# EAGLE board KegeratorController (EAGLE 7.4.0)
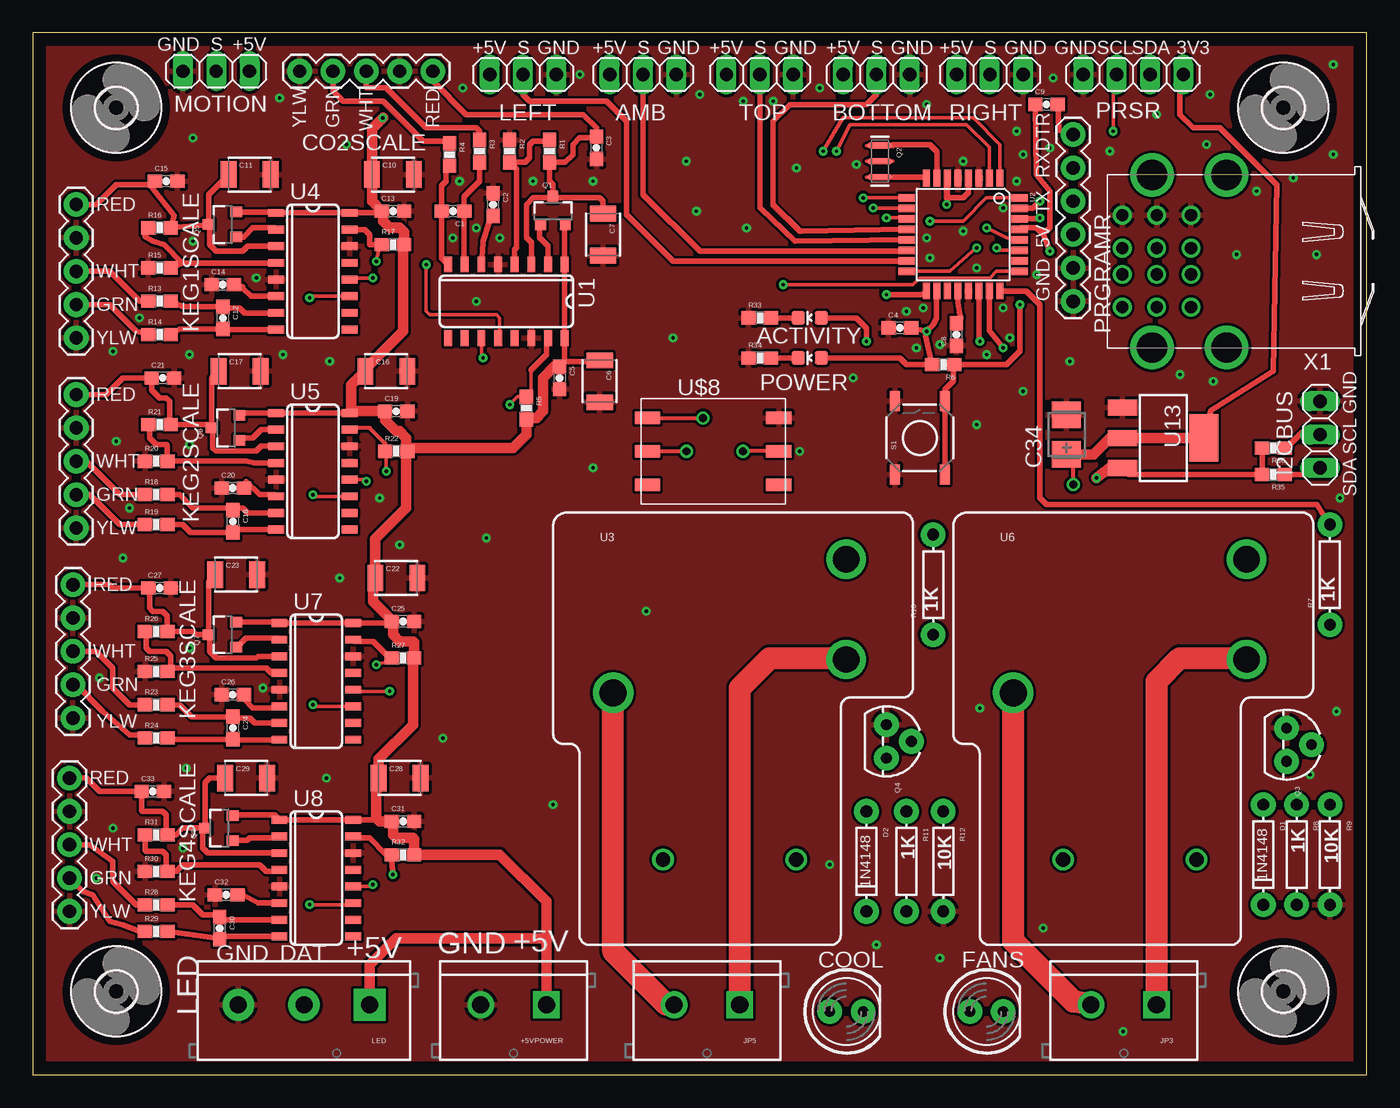
[diagram p0: board, top side]
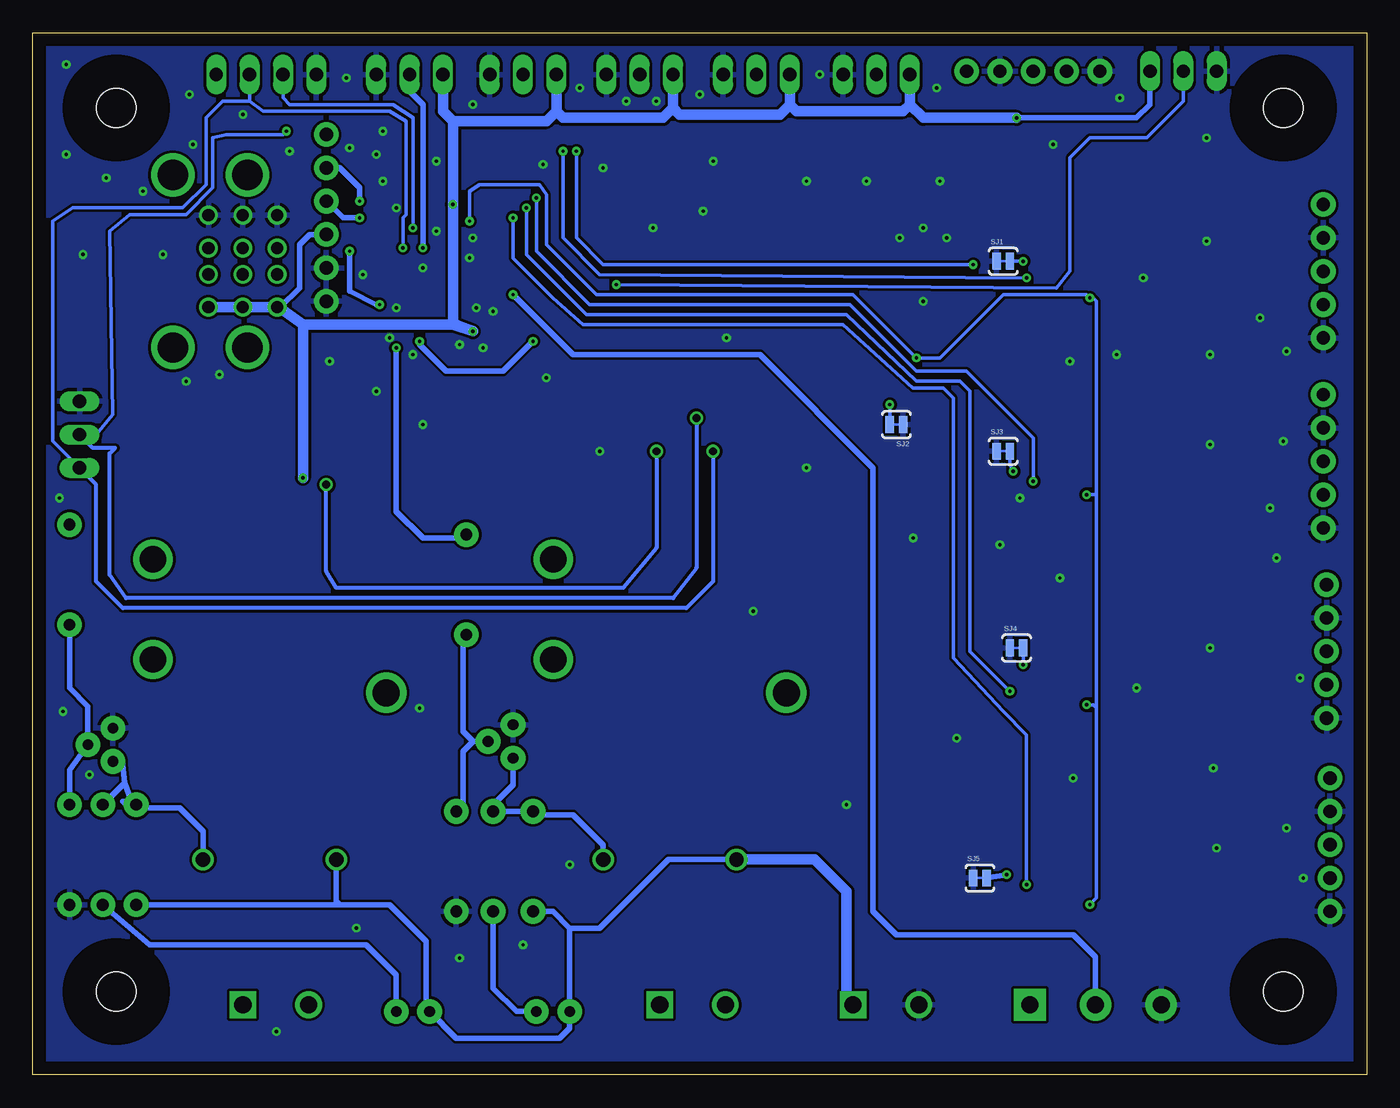
[diagram p1: board, bottom side, seen from below]

Size 101.6 x 79.38 mm. Coordinates in mm from the lower left corner, seen from the top.
Outline: 0,0 101.6,0 101.6,79.38 0,79.38 0,0
Copper layers (1*16): Top 0.035mm / dielectric 1.5mm / Bottom 0.035mm
Design rules "default *": minimum track width 10mil, minimum drill 10mil, track to track 8mil, track to pad 8mil, pad to pad 8mil, via to via 8mil, smd to smd 8mil, copper to edge 40mil, drill to drill 8mil, minimum pad ring 10mil, minimum via ring 8mil, stop-mask expansion 4mil, vias tented up to drill 0mil, thermal gap 10mil
Net classes: 0 default: width 0.203 mm; 1 vcc: width 0.254 mm

## Footprints (pad centres in the part's own frame; a part is rotated, then mirrored left to right if it is on the bottom)
SCREWTERMINAL-5MM-2 = drill 1.3 pad 2.032 square: 1 0,0 | drill 1.3 pad 2.032: 2 5,0
0603-LED-ALT1 = smd 1 x 1: A 0,-0.877; C 0,0.877
1X03 = drill 1.016 long: 1 -2.54,0; 2 0,0; 3 2.54,0
0603-CAP = smd 1.1 x 1: 1 -0.85,0; 2 0.85,0
1210 = smd 1.2 x 2: 1 -1.6,0; 2 1.6,0
CT3528 = smd 2 x 2.2: + -1.5,0; - 1.5,0
1X05 = drill 1.016 pad 1.88: 1 0,0; 2 2.54,0; 3 5.08,0; 4 7.62,0; 5 10.16,0
LED5MM = drill 0.813 pad 1.88: A -1.27,0; K 1.27,0
DIODE-1N4148 = drill 0.9 pad 1.88: A -3.81,0; C 3.81,0
SCREWTERMINAL-5MM-3 = drill 1.3 pad 2.413 square: 1 0,0 | drill 1.3 pad 2.413: 2 5,0; 3 10,0
1X06 = drill 1.016 pad 1.88: 1 0,0; 2 2.54,0; 3 5.08,0; 4 7.62,0; 5 10.16,0; 6 12.7,0
1X04 = drill 1.016 long: 1 -3.81,0; 2 -1.27,0; 3 1.27,0; 4 3.81,0
SOT23-3 = smd 0.8 x 0.9: 1 -0.95,-1; 2 0.95,-1; 3 0,1.1
RESONATOR-SMD-1:1 = smd 0.45 x 1.905: 1 -1.2,0; 2 0,0; 3 1.2,0
TO-92 = drill 0.813 pad 1.88: 1 -1.27,0; 2 0,1.905; 3 1.27,0
0603-RES = smd 1.1 x 1: 1 -0.85,0; 2 0.85,0
AXIAL-0.3 = drill 0.9 pad 1.88: P$1 -3.81,0; P$2 3.81,0
TACTILE-SWITCH-SMD-ALT01 = smd 1.524 x 0.762: 1 -2.794,1.905; 2 2.794,1.905; 3 -2.794,-1.905; 4 2.794,-1.905
PAD-JUMPER-2-NC_BY_TRACE_YES_SILK = smd 0.635 x 1.27: 1 -0.508,0; 2 0.508,0
SO16 = smd 0.6 x 1.2: 1 -4.445,-2.8; 2 -3.175,-2.8; 3 -1.905,-2.8; 4 -0.635,-2.8; 5 0.635,-2.8; 6 1.905,-2.8; 7 3.175,-2.8; 8 4.445,-2.8; 9 4.445,2.8; 10 3.175,2.8; 11 1.905,2.8; 12 0.635,2.8; 13 -0.635,2.8; 14 -1.905,2.8; 15 -3.175,2.8; 16 -4.445,2.8
TQFP32-08 = smd 1.27 x 0.559: 1 -4.293,2.8; 2 -4.293,2; 3 -4.293,1.2; 4 -4.293,0.4; 5 -4.293,-0.4; 6 -4.293,-1.2; 7 -4.293,-2; 8 -4.293,-2.8; 17 4.293,-2.8; 18 4.293,-2; 19 4.293,-1.2; 20 4.293,-0.4; 21 4.293,0.4; 22 4.293,1.2; 23 4.293,2; 24 4.293,2.8 | smd 0.559 x 1.27: 9 -2.8,-4.293; 10 -2,-4.293; 11 -1.2,-4.293; 12 -0.4,-4.293; 13 0.4,-4.293; 14 1.2,-4.293; 15 2,-4.293; 16 2.8,-4.293; 25 2.8,4.293; 26 2,4.293; 27 1.2,4.293; 28 0.4,4.293; 29 -0.4,4.293; 30 -1.2,4.293; 31 -2,4.293; 32 -2.8,4.293
RELAY-T9A-2 = drill 1.1: COIL1 -6.61,-10.27; COIL2 3.55,-10.27 | drill 2.057: MAIN -10.41,2.43 | drill 2: NC 7.35,12.6; NO 7.35,4.97
SOT223 = smd 1.219 x 2.235: 1 -2.311,-3.099; 2 0,-3.099; 3 2.311,-3.099 | smd 3.6 x 2.2: 4 0,3.099
3,0 = hole 3: 0,0
SMTAN = smd 1.93 x 0.965: P$1 5,2.54; P$2 5,0; P$3 5,-2.54; P$4 -5,-2.54; P$5 -5,0; P$6 -5,2.54
85-32003-00X-1 = drill 0.92 pad 1.27: 1-1 2.71,3.5; 1-2 2.71,1; 1-3 2.71,-1; 1-4 2.71,-3.5; 2-1 5.33,3.5; 2-2 5.33,1; 2-3 5.33,-1; 2-4 5.33,-3.5; 3-1 7.95,3.5; 3-2 7.95,1; 3-3 7.95,-1; 3-4 7.95,-3.5 | drill 2.3 pad 3: M1 0,6.57; M2 0,-6.57; M3 5.68,6.57; M4 5.68,-6.57

## Placement (x,y rotation side)
+5VPOWER  Load  [SCREWTERMINAL-5MM-2]  39.12,5.33 180 top
ACTIVITY  Red  [0603-LED-ALT1]  59.18,57.66 90 top
AMB  [1X03]  46.48,76.2 0 top
BOTTOM  [1X03]  64.26,76.2 0 top
C1  0.1uF  [0603-CAP]  32,65.79 180 top
C2  0.1uF  [0603-CAP]  35.05,66.29 270 top
C3  0.1uF  [0603-CAP]  42.93,70.61 270 top
C4  0.1uF  [0603-CAP]  66.04,56.9 0 top
C5  0.1uF  [0603-CAP]  40.13,53.09 270 top
C6  10uF  [1210]  43.18,52.83 270 top
C7  10uF  [1210]  43.43,64.01 270 top
C8  0.1uF  [0603-CAP]  70.36,56.39 90 top
C9  0.1uF  [0603-CAP]  77.22,73.91 0 top
C10  10uF  [1210]  27.43,68.58 0 top
C11  10uF  [1210]  16.51,68.58 0 top
C12  0.1uF  [0603-CAP]  14.48,57.66 270 top
C13  0.1uF  [0603-CAP]  27.43,65.79 0 top
C14  0.1uF  [0603-CAP]  14.48,60.2 0 top
C15  0.1uF  [0603-CAP]  10.16,68.07 0 top
C16  10uF  [1210]  26.92,53.59 0 top
C17  10uF  [1210]  15.75,53.59 0 top
C18  0.1uF  [0603-CAP]  15.24,42.16 270 top
C19  0.1uF  [0603-CAP]  27.69,50.55 0 top
C20  0.1uF  [0603-CAP]  15.24,44.7 0 top
C21  0.1uF  [0603-CAP]  9.91,53.09 0 top
C22  10uF  [1210]  27.69,37.85 0 top
C23  10uF  [1210]  15.49,38.1 0 top
C24  0.1uF  [0603-CAP]  15.24,26.42 270 top
C25  0.1uF  [0603-CAP]  28.19,34.54 0 top
C26  0.1uF  [0603-CAP]  15.24,28.96 0 top
C27  0.1uF  [0603-CAP]  9.65,37.08 0 top
C28  10uF  [1210]  27.94,22.61 0 top
C29  10uF  [1210]  16.26,22.61 0 top
C30  0.1uF  [0603-CAP]  14.22,11.18 270 top
C31  0.1uF  [0603-CAP]  28.19,19.3 0 top
C32  0.1uF  [0603-CAP]  14.73,13.72 0 top
C33  0.1uF  [0603-CAP]  9.14,21.59 0 top
C34  10uF  [CT3528]  78.74,48.77 90 top
CO2SCALE  [1X05]  20.32,76.45 0 top
COOL  [LED5MM]  61.98,4.83 0 top
D1  1N4148  [DIODE-1N4148]  93.73,16.76 270 top
D2  1N4148  [DIODE-1N4148]  63.5,16.26 270 top
FANS  [LED5MM]  72.64,4.83 0 top
I2CBUS  [1X03]  98.04,48.77 90 top
JP3  Load  [SCREWTERMINAL-5MM-2]  85.6,5.33 180 top
JP5  Load  [SCREWTERMINAL-5MM-2]  53.85,5.33 180 top
KEG1SCALE  [1X05]  3.3,56.13 90 top
KEG2SCALE  [1X05]  3.3,41.66 90 top
KEG3SCALE  [1X05]  3.05,27.18 90 top
KEG4SCALE  [1X05]  2.79,12.45 90 top
LED  [SCREWTERMINAL-5MM-3]  25.65,5.33 180 top
LEFT  [1X03]  37.34,76.2 0 top
MOTION  [1X03]  13.97,76.45 180 top
POWER  Red  [0603-LED-ALT1]  59.18,54.61 90 top
PRGRAMR  FTDI Basic  [1X06]  79.25,71.63 270 top
PRSR  [1X04]  83.82,76.2 180 top
Q1  MMBT4403  [SOT23-3]  39.62,65.79 0 top
Q2  8/16/20MHz  [RESONATOR-SMD-1:1]  64.52,69.6 270 top
Q3  2N3904  [TO-92]  95.5,25.15 270 top
Q4  2N3904  [TO-92]  65.02,25.4 270 top
Q5  MMBT4403  [SOT23-3]  14.48,64.77 90 top
Q6  MMBT4403  [SOT23-3]  14.73,49.28 90 top
Q7  MMBT4403  [SOT23-3]  14.48,33.53 90 top
Q8  MMBT4403  [SOT23-3]  14.22,18.8 90 top
R1  20K  [0603-RES]  39.37,70.36 270 top
R2  8.2K  [0603-RES]  36.32,70.36 270 top
R3  100  [0603-RES]  34.04,70.36 270 top
R4  100  [0603-RES]  31.75,70.1 270 top
R5  10K  [0603-RES]  37.59,50.8 270 top
R6  10K  [0603-RES]  69.34,54.1 180 top
R7  1K  [AXIAL-0.3]  98.81,38.1 90 top
R8  1K  [AXIAL-0.3]  96.27,16.76 270 top
R9  10K  [AXIAL-0.3]  98.81,16.76 270 top
R10  1K  [AXIAL-0.3]  68.58,37.34 90 top
R11  1K  [AXIAL-0.3]  66.55,16.26 270 top
R12  10K  [AXIAL-0.3]  69.34,16.26 270 top
R13  100  [0603-RES]  9.65,58.93 0 top
R14  100  [0603-RES]  9.65,56.39 0 top
R15  8.2K  [0603-RES]  9.65,61.47 0 top
R16  20K  [0603-RES]  9.65,64.52 0 top
R17  10K  [0603-RES]  27.43,63.25 0 top
R18  100  [0603-RES]  9.4,44.2 0 top
R19  100  [0603-RES]  9.4,41.91 0 top
R20  8.2K  [0603-RES]  9.4,46.74 0 top
R21  20K  [0603-RES]  9.65,49.53 0 top
R22  10K  [0603-RES]  27.69,47.5 0 top
R23  100  [0603-RES]  9.4,28.19 0 top
R24  100  [0603-RES]  9.4,25.65 0 top
R25  8.2K  [0603-RES]  9.4,30.73 0 top
R26  20K  [0603-RES]  9.4,33.78 0 top
R27  10K  [0603-RES]  28.19,31.75 0 top
R28  100  [0603-RES]  9.4,12.95 0 top
R29  100  [0603-RES]  9.4,10.92 0 top
R30  8.2K  [0603-RES]  9.4,15.49 0 top
R31  20K  [0603-RES]  9.4,18.29 0 top
R32  10K  [0603-RES]  28.19,16.76 0 top
R33  1K  [0603-RES]  55.37,57.66 0 top
R34  1K  [0603-RES]  55.37,54.61 0 top
R35  10K  [0603-RES]  94.49,45.72 180 top
R36  10K  [0603-RES]  94.49,47.75 180 top
RIGHT  [1X03]  72.9,76.2 0 top
S1  Reset  [TACTILE-SWITCH-SMD-ALT01]  67.56,48.51 90 top
SJ1  [PAD-JUMPER-2-NC_BY_TRACE_YES_SILK]  27.69,61.98 0 bottom
SJ2  [PAD-JUMPER-2-NC_BY_TRACE_YES_SILK]  35.81,49.53 180 bottom
SJ3  [PAD-JUMPER-2-NC_BY_TRACE_YES_SILK]  27.69,47.5 0 bottom
SJ4  [PAD-JUMPER-2-NC_BY_TRACE_YES_SILK]  26.67,32.51 0 bottom
SJ5  [PAD-JUMPER-2-NC_BY_TRACE_YES_SILK]  29.46,14.99 0 bottom
TOP  [1X03]  55.37,76.2 0 top
U1  HX711  [SO16]  36.07,58.93 180 top
U2  ATMEGA328  [TQFP32-08]  70.87,64.01 270 top
U3  RELAYPTH3  [RELAY-T9A-2]  54.61,26.67 0 top
U4  HX711  [SO16]  21.34,61.21 270 top
U5  HX711  [SO16]  21.34,45.97 270 top
U6  RELAYPTH3  [RELAY-T9A-2]  85.09,26.67 0 top
U7  HX711  [SO16]  21.59,29.97 270 top
U8  HX711  [SO16]  21.59,14.99 270 top
U13  LM1117MP-3.3  [SOT223]  86.11,48.51 270 top
U$4  [3,0]  6.35,73.66 0 top
U$5  [3,0]  6.35,6.35 0 top
U$6  [3,0]  95.25,6.35 0 top
U$7  [3,0]  95.25,73.66 0 top
U$8  ABPMANN030PG2A3  [SMTAN]  51.82,47.5 0 top
X1  USB_3P-85-32003-00X-1  [85-32003-00X-1]  90.93,61.98 180 top

## Library data of the parts
+5VPOWER C4 C8 C9 COOL D1 D2 FANS JP3 JP5 PRGRAMR Q3 Q4 R6-R12 R33-R36 U2 U3 U6 = SparkFun
ACTIVITY POWER Q2 S1 = Testing
AMB BOTTOM I2CBUS LEFT MOTION PRSR RIGHT TOP = pinhead
C1-C3 C5 C12-C15 C18-C21 C24-C27 C30-C33 = SparkFun-Capacitors; PROD_ID: CAP-08604
C6 C7 C10 C11 C16 C17 C22 C23 C28 C29 = SparkFun-Capacitors; PROD_ID: CAP-09824
C34 = rcl
CO2SCALE KEG1SCALE KEG2SCALE KEG3SCALE KEG4SCALE = SparkFun-Connectors
LED = SparkFun-Connectors; STOREFRONT_ID: PRT-08433
Q1 Q5-Q8 = SparkFun-DiscreteSemi; PROD_ID: TRANS-09245
R1 R16 R21 R26 R31 = SparkFun-Resistors; PROD_ID: RES-09383
R2 R15 R20 R25 R30 = SparkFun-Resistors; PROD_ID: RES-10646
R3 R4 R13 R14 R18 R19 R23 R24 R28 R29 = SparkFun-Resistors; PROD_ID: RES-07863
R5 R17 R22 R27 R32 = SparkFun-Resistors; PROD_ID: RES-00824
SJ1-SJ5 = SparkFun-Passives
U1 U4 U5 U7 U8 = Testing; PROD_ID: IC-12445
U13 = GHI
U$4-U$7 = holes
U$8 = SoftwareLogistics
X1 = con-cypressindustries; OC_FARNELL: unknown; OC_NEWARK: unknown

## Nets
+3V3: C34.+ PRSR.1 U13.2 U13.4 U$8.P$2
A2+: KEG1SCALE.2 R14.1
A2-: KEG1SCALE.3 R13.1
A3: U2.26
A3+: KEG2SCALE.2 R19.1
A3-: KEG2SCALE.3 R18.1
A4+: KEG3SCALE.2 R24.1
A4-: KEG3SCALE.3 R23.1
A5+: KEG4SCALE.2 R29.1
A5-: KEG4SCALE.3 R28.1
A6: U2.19
A+: CO2SCALE.2 R4.1
A-: CO2SCALE.3 R3.1
AREF: C8.2 U2.20
AVDD: C3.1 C7.1 CO2SCALE.5 Q1.3 R1.2 U1.3
AVDD2: C11.1 C15.1 KEG1SCALE.5 Q5.3 R16.2 U4.3
AVDD3: C17.1 C21.1 KEG2SCALE.5 Q6.3 R21.2 U5.3
AVDD4: C23.1 C27.1 KEG3SCALE.5 Q7.3 R26.2 U7.3
AVDD5: C29.1 C33.1 KEG4SCALE.5 Q8.3 R31.2 U8.3
COIL1: D2.A Q4.3 R11.P$1 U3.COIL2
COIL2: D1.A Q3.3 R8.P$1 U6.COIL2
COMPRESSOR_RELAY: R10.P$2 U2.23
DAT1: U1.12 U2.1
DAT2: U2.2 U4.12
DAT3: U2.9 U5.12
DAT4: U2.10 U7.12
DAT5: U2.11 U8.12
DHT11-1: LEFT.2 U2.15
DHT11-2: RIGHT.2 U2.16
DHT22-1: BOTTOM.2 U2.12
DHT22-2: TOP.2 U2.13
DHT22-3: AMB.2 U2.14
DTR: C9.2 PRGRAMR.1
GND: +5VPOWER.2 AMB.3 BOTTOM.3 C2.1 C3.2 C4.1 C5.2 C6.2 C7.2 C8.1 C10.2 C11.2 C13.2 C14.1 C15.2 C16.2 C17.2 C19.2 C20.1 C21.2 C22.2 C23.2 C25.2 C26.1 C27.2 C28.2 C29.2 C31.2 C32.1 C33.2 C34.- CO2SCALE.1 CO2SCALE.4 I2CBUS.3 KEG1SCALE.1 KEG1SCALE.4 KEG2SCALE.1 KEG2SCALE.4 KEG3SCALE.1 KEG3SCALE.4 KEG4SCALE.1 KEG4SCALE.4 LED.3 LEFT.3 MOTION.3 PRGRAMR.5 PRGRAMR.6 PRSR.4 Q2.2 Q3.1 Q4.1 R2.1 R9.P$2 R12.P$2 R15.1 R20.1 R25.1 R30.1 R33.1 R34.1 RIGHT.3 S1.1 S1.2 SJ1.1 SJ2.1 SJ3.1 SJ4.1 SJ5.1 TOP.3 U1.5 U1.14 U2.3 U2.5 U2.21 U4.5 U4.14 U5.5 U5.14 U7.5 U7.14 U8.5 U8.14 U13.1 U$8.P$1 X1.1-4 X1.2-4 X1.3-4
HEAD_FAN_RELAY: R7.P$2 U2.24
I2C-SCL: I2CBUS.2 PRSR.3 R36.1 U2.28 U$8.P$6
I2C-SDA: I2CBUS.1 PRSR.2 R35.1 U2.27 U$8.P$5
LED_OUTPUT: LED.2 U2.17
LED_SIGNAL: ACTIVITY.A U2.22
MOTION_DETECTOR: MOTION.2 U2.25
N$1: R5.1 SJ2.2 U1.15
N$2: C1.1 R3.2 U1.7
N$3: C1.2 R4.2 U1.8
N$4: Q1.1 U1.2
N$5: Q2.3 U2.8
N$6: R1.1 R2.2 U1.4
N$7: C2.2 U1.6
N$8: Q2.1 U2.7
N$9: Q3.2 R7.P$1 R9.P$1
N$10: FANS.K R8.P$2
N$11: Q4.2 R10.P$1 R12.P$1
N$12: COOL.K R11.P$2
N$13: Q5.1 U4.2
N$14: R15.2 R16.1 U4.4
N$15: C14.2 U4.6
N$16: R17.1 SJ1.2 U4.15
N$17: C12.1 R13.2 U4.7
N$18: C12.2 R14.2 U4.8
N$19: Q6.1 U5.2
N$20: R20.2 R21.1 U5.4
N$21: C20.2 U5.6
N$22: R22.1 SJ3.2 U5.15
N$23: C18.1 R18.2 U5.7
N$24: C18.2 R19.2 U5.8
N$25: Q7.1 U7.2
N$26: R25.2 R26.1 U7.4
N$27: C26.2 U7.6
N$28: R27.1 SJ4.2 U7.15
N$29: C24.1 R23.2 U7.7
N$30: C24.2 R24.2 U7.8
N$31: Q8.1 U8.2
N$32: R30.2 R31.1 U8.4
N$33: C32.2 U8.6
N$34: R32.1 SJ5.2 U8.15
N$35: C30.1 R28.2 U8.7
N$36: C30.2 R29.2 U8.8
N$37: JP3.1 U6.NO
N$38: JP3.2 U6.MAIN
N$39: JP5.1 U3.NO
N$40: JP5.2 U3.MAIN
N$42: ACTIVITY.C R33.2
N$44: POWER.C R34.2
RESET: C9.1 R6.1 S1.3 S1.4 U2.29
RXI: PRGRAMR.3 U2.30
SCK: U1.11 U2.32 U4.11 U5.11 U7.11 U8.11
TXO: PRGRAMR.2 U2.31
VCC: +5VPOWER.1 AMB.1 BOTTOM.1 C4.2 C5.1 C6.1 C10.1 C13.1 C16.1 C19.1 C22.1 C25.1 C28.1 C31.1 COOL.A D1.C D2.C FANS.A LED.1 LEFT.1 MOTION.1 POWER.A PRGRAMR.4 Q1.2 Q5.2 Q6.2 Q7.2 Q8.2 R5.2 R6.2 R17.2 R22.2 R27.2 R32.2 R35.2 R36.2 RIGHT.1 TOP.1 U1.1 U1.16 U2.4 U2.6 U2.18 U3.COIL1 U4.1 U4.16 U5.1 U5.16 U6.COIL1 U7.1 U7.16 U8.1 U8.16 U13.3 X1.1-1 X1.2-1 X1.3-1

## Tracks (layer width: path | path; a pad name or v marks a point on that pad's centre or on a via)
+3V3  (via drill 0.6)
  Top 0.305: U$8.P$2 v54.1,47.5 | v79.25,44.96 79.25,47.27
  Top 0.406: U13.4 89.71,50.6 94.49,53.59 94.74,67.82 90.42,72.14 88.39,72.14 87.38,73.15 87.38,75.95 PRSR.1
  Top 0.813: C34.+ 79.25,47.27 80.8,47.27 82.04,48.51 U13.2 U13.4
  Bottom 0.305: v54.1,47.5 54.1,40.13 56.64,37.08 78.49,37.08 79.25,38.35 v79.25,44.96
A2+
  Top 0.406: R14.1 7.87,56.64 5.84,58.67 KEG1SCALE.2
A2-
  Top 0.406: R13.1 8.13,58.93 5.84,61.21 KEG1SCALE.3
A3+
  Top 0.406: KEG2SCALE.2 4.32,44.2 6.6,41.91 R19.1
A3-
  Top 0.406: KEG2SCALE.3 4.06,46.74 6.6,44.2 R18.1
A4+
  Top 0.406: KEG3SCALE.2 3.3,29.72 5.33,27.69 7.37,25.91 8.29,25.91 R24.1
A4-
  Top 0.406: KEG3SCALE.3 4.83,32.26 6.1,30.99 6.1,29.46 7.37,28.19 R23.1
A5+
  Top 0.406: R29.1 8.13,10.92 6.86,11.43 5.84,11.68 4.57,13.72 3.81,13.97 KEG4SCALE.2
A5-
  Top 0.406: KEG4SCALE.3 4.32,17.53 6.1,16.26 6.1,14.73 7.87,12.95 R28.1
A+
  Top 0.406: CO2SCALE.2 22.86,74.93 23.62,74.17 26.67,74.17 29.72,71.12 31.66,71.12 R4.1
A-
  Top 0.406: CO2SCALE.3 25.4,75.18 26.92,75.18 29.97,72.14 33.78,72.14 34.04,71.88 R3.1
AREF
  Top 0.406: U2.20 70.47,58.82 70.61,57.91 70.7,57.66 C8.2
AVDD
  Top 0.406: CO2SCALE.5 30.48,75.69 33.02,73.15 41.91,73.15 42.93,72.14 C3.1 42.84,71.37 41.66,71.37 41.15,70.87 41.15,70.1 40.55,69.51 R1.2 39.37,68.07 39.62,67.82 Q1.3 | C7.1 43.43,66.55 43.18,66.8 39.71,66.8 Q1.3 | U1.3 37.97,63.37 37.59,63.75 37.59,66.29 38.1,66.8 39.54,66.8 Q1.3
AVDD2
  Top 0.406: KEG1SCALE.5 4.83,66.29 6.35,67.82 8.89,67.82 | 8.89,67.82 9.06,67.82 C15.1 | 8.89,67.82 10.76,65.44 R16.2 Q5.3 | U4.3 16.38,63.12 16,62.74 13.97,62.74 13.46,63.25 13.46,64.69 Q5.3 | Q5.3 13.38,67.05 C11.1
AVDD3
  Top 0.406: KEG2SCALE.5 5.59,51.82 6.86,53.09 C21.1 9.06,52.16 9.65,51.56 10.16,51.56 10.41,51.31 10.41,49.62 R21.2 13.38,49.53 Q6.3 | Q6.3 13.63,53.08 C17.1 | U5.3 17.4,47.88 17.02,47.5 13.97,47.5 13.72,47.75 13.72,49.19 Q6.3
AVDD4
  Top 0.406: U7.3 17.14,31.88 17.02,31.75 13.97,31.75 13.46,32.26 13.46,33.44 Q7.3 | KEG3SCALE.5 5.84,37.34 6.1,37.08 C27.1 8.89,37 8.89,35.56 9.14,35.31 9.91,35.31 10.25,34.96 R26.2 12.19,33.78 12.45,33.53 Q7.3 | Q7.3 13.38,37.58 C23.1
AVDD5
  Top 0.406: KEG4SCALE.5 4.06,22.61 5.08,21.59 C33.1 8.29,20.15 8.38,20.07 9.91,20.07 10.16,19.81 10.16,18.38 R31.2 10.92,18.29 11.43,18.8 Q8.3 | Q8.3 13.12,22.27 13.46,22.61 C29.1 | U8.3 13.34,16.89 12.95,17.27 12.95,18.63 Q8.3
COIL1
  Bottom 0.406: U3.COIL2 58.16,17.52 60.45,19.81 63.25,19.81 D2.A R11.P$1 66.55,20.57 65.02,22.1 Q4.3
COIL2
  Bottom 0.406: Q3.3 94.74,23.62 94.61,22.23 | 94.61,22.23 R8.P$1 | U6.COIL2 88.64,18.54 90.42,20.32 94.23,20.32 94.74,20.83 94.49,20.83 D1.A 93.98,20.57 94.61,22.23
COMPRESSOR_RELAY  (via drill 0.25)
  Top 0.406: U2.23 72.87,56.67 v73.91,55.37
  Bottom 0.406: v73.91,55.37 73.91,42.93 71.88,40.89 68.83,40.89 R10.P$2
DAT1  (via drill 0.25)
  Top 0.254: U2.1 73.67,70.86 71.63,72.9 61.72,72.9 v60.2,70.36 | v29.97,61.72 29.97,58.17 30.23,57.91 35.31,57.91 35.56,57.66 35.56,56.26 U1.12
  Bottom 0.254: v60.2,70.36 60.2,63.75 58.17,61.72 v29.97,61.72
DAT2  (via drill 0.25)
  Top 0.254: U2.2 72.87,70.64 71.12,72.39 62.23,72.39 v61.21,70.36 | v25.91,60.71 24.26,60.71 U4.12
  Bottom 0.254: v61.21,70.36 61.21,63.75 58.42,60.96 v25.91,60.71
DAT3  (via drill 0.25)
  Top 0.254: U5.12 25.27,45.34 v25.4,45.21 | v63.25,66.8 U2.9
  Bottom 0.254: v25.4,45.21 25.4,48.51 30.48,53.59 34.29,53.59 39.37,58.67 59.18,58.67 63.25,62.74 v63.25,66.8
DAT4  (via drill 0.25)
  Top 0.254: U2.10 64.04,66.01 v64.01,66.04 | v27.18,29.21 24.52,29.21 U7.12
  Bottom 0.254: v64.01,66.04 64.01,62.48 59.44,57.91 39.62,57.91 34.29,52.83 30.99,52.83 30.23,52.07 30.23,32.26 v27.18,29.21
DAT5  (via drill 0.25)
  Top 0.254: U8.12 25.78,14.35 v25.91,14.48 | v65.02,65.28 66.5,65.28 U2.11
  Bottom 0.254: v25.91,14.48 25.91,25.91 27.69,27.69 31.5,31.75 31.5,51.56 32.26,52.32 34.54,52.32 39.88,57.15 59.69,57.15 61.98,59.18 65.02,62.23 v65.02,65.28
DHT11-1
  Top 0.406: LEFT.2 37.34,74.68 37.85,74.17 43.69,74.17 45.21,72.64 45.21,65.53 48.77,61.98 66.54,61.98 U2.15
DHT11-2  (via drill 0.25)
  Top 0.254: U2.16 69.84,61.21 v71.88,62.99
  Bottom 0.406: v71.88,62.99 71.88,73.91 72.9,74.93 RIGHT.2
DHT22-1
  Top 0.406: BOTTOM.2 64.26,74.68 63.5,73.91 57.66,73.91 56.39,72.64 56.39,66.29 58.42,64.26 58.59,64.26 U2.12
DHT22-2
  Top 0.406: TOP.2 55.37,66.04 58.05,63.5 U2.13
DHT22-3
  Top 0.406: AMB.2 46.48,67.06 50.8,62.74 66.5,62.74 U2.14
DTR
  Top 0.406: C9.2 78.14,71.97 PRGRAMR.1
GND  (via drill 0.25)
  other vias: 17.53,29.46 17.02,60.71 33.78,64.52 35.56,63.75 75.44,52.07 76.96,11.18 42.67,68.07 72.64,54.86 71.88,61.47 68.07,63.75 68.07,73.91 70.87,64.26 70.87,69.6 33.78,58.93 99.31,27.69 97.28,22.86 73.91,58.42 77.47,70.61 8.13,57.66 7.37,43.18 11.94,48.01 12.19,63.5 11.94,32.51 5.08,30.23 4.83,14.99 11.43,17.27 38.1,68.07 32.51,68.07 32,63.75 62.74,69.34 50.55,65.79 58.17,69.09 54.1,74.17 75.44,70.1 82.04,70.36 77.72,75.95 89.66,74.68 62.48,53.09 71.88,49.53 74.42,56.13 67.31,55.37 66.55,58.17 68.33,62.23 74.93,68.07 73.91,66.04 74.93,71.88 85.6,73.15 99.06,70.1 89.41,70.87 93.22,67.31 96.01,68.33 91.69,62.48 97.79,62.48 99.06,76.96 99.57,43.94 87.38,53.34 89.92,52.83 78.99,54.36 83.06,3.3 64.26,9.91 69.09,8.89 60.71,16 72.14,27.94 22.35,22.61 31.24,25.65 23.37,37.85 27.94,40.39 26.42,43.94 11.68,23.37 6.1,18.8 6.86,39.37 6.35,48.26 6.1,55.12 11.94,54.86 19.05,54.86 22.61,54.36 34.54,40.89 42.67,46.23 46.74,35.31 48.77,56.13 39.62,20.57 58.42,47.5 54.36,64.52 49.78,69.6 23.88,70.87 12.19,71.37 18.8,74.42 32.77,75.18 50.8,74.68 59.94,75.18 41.66,76.2 76.45,60.96 56.39,74.17 69.09,55.63 67.82,58.42
  pour Bottom: 0,78.74 101.6,78.74 101.6,0 0,0 0,1.27
  pour Top: 0,78.74 101.6,78.74 101.6,0 0,0
HEAD_FAN_RELAY
  Top 0.406: U2.24 75.67,59.72 76.71,58.67 76.71,43.94 77.22,43.43 97.79,43.43 R7.P$2
I2C-SCL  (via drill 0.25, 0.6)
  Top 0.254: U2.28 74.57,63.61 74.17,63.75 v72.64,64.52 | v82.3,71.88 82.3,75.95 PRSR.3
  Top 0.305: U$8.P$6 v51.05,50.04
  Top 0.406: R36.1 95.48,47.75 96.65,48.92 97.89,48.92 I2CBUS.2
  Bottom 0.254: v72.64,64.52 72.64,72.9 74.17,73.91 82.04,73.91 82.55,74.42 PRSR.3 | I2CBUS.2 96.77,48.77 95.5,50.29 95.76,64.26 94.23,65.53 89.92,65.53 87.88,67.56 87.88,71.37 86.87,71.63 82.55,71.63 v82.3,71.88
  Bottom 0.305: v51.05,50.04 51.05,38.61 52.83,36.32 94.49,36.32 95.76,38.1 95.76,47.33 R36.1 97.03,47.75 I2CBUS.2
I2C-SDA  (via drill 0.25, 0.6)
  Top 0.254: U2.27 73.59,62.81 v73.41,62.99
  Top 0.305: U$8.P$5 v49.78,47.5
  Top 0.406: R35.1 97.54,45.72 I2CBUS.1
  Bottom 0.254: PRSR.2 85.09,74.17 | 85.09,74.17 87.12,74.17 88.39,72.9 88.39,67.82 90.17,66.04 98.55,66.04 100.08,65.02 100.08,48.26 I2CBUS.1 | v73.41,62.99 73.41,65.28 73.15,65.53 73.15,72.64 74.42,73.41 84.07,73.41 85.09,74.17
  Bottom 0.305: v49.78,47.5 49.78,37.59 51.82,35.56 94.74,35.56 96.77,37.59 96.77,44.96 I2CBUS.1
LED_OUTPUT  (via drill 0.25)
  Top 0.406: v65.02,59.44 67.79,59.44 U2.17
  Bottom 0.406: LED.2 20.65,8.97 22.35,10.67 35.81,10.67 37.59,12.45 37.59,46.23 46.23,54.86 60.45,54.86 v65.02,59.44
LED_SIGNAL  (via drill 0.25)
  Top 0.406: U2.22 72.07,55.95 v72.14,55.88 | v63.5,55.88 63.5,56.9 62.74,57.66 ACTIVITY.A
  Bottom 0.406: v72.14,55.88 72.14,55.63 70.1,53.59 65.79,53.59 v63.5,55.88
MOTION_DETECTOR  (via drill 0.25)
  Top 0.254: v57.15,60.2 67.06,60.2 67.56,60.71 72.9,60.71 73.41,61.21 U2.25
  Bottom 0.254: MOTION.2 13.97,74.17 16.76,71.37 21.08,71.37 22.61,69.85 22.61,61.21 23.62,59.94 v57.15,60.2
N$1  (via drill 0.25)
  Top 0.254: v36.32,51.05 36.92,51.65 R5.1 37.93,51.99 37.93,53.68
  Top 0.406: 37.93,53.68 39.12,54.86 39.12,56 U1.15
  Bottom 0.254: SJ2.2 v36.32,51.05
N$2
  Top 0.406: U1.7 32.85,61.77 C1.1 32.85,66.89 34.04,68.07 R3.2
N$3
  Top 0.406: U1.8 31.15,62.2 C1.2 31.15,67.73 31.5,68.07 31.5,69.25 R4.2
N$4
  Top 0.406: U1.2 39.24,63.12 38.61,63.75 38.61,64.72 Q1.1
N$5
  Top 0.406: 65.53,68.4 67.97,68.4 U2.8
N$6
  Top 0.406: R1.1 39.28,71.12 38.1,71.12 37.85,70.87 37.85,69.85 37.5,69.51 R2.2 36.83,69 36.83,62.99 36.7,62.87 U1.4
N$7
  Top 0.406: C2.2 34.8,65.02 34.29,63.5 34.29,63.38 U1.6
N$8
  Top 0.406: U2.7 68.87,70.33 68.33,70.87 65.53,70.87 65.53,70.8
N$9
  Bottom 0.406: R9.P$1 98.81,23.24 Q3.2 97.41,28.07 98.81,29.46 R7.P$1
N$10
  Bottom 0.406: FANS.K 73.91,7.62 76.2,9.91 92.71,9.91 R8.P$2
N$11
  Bottom 0.406: Q4.2 68.07,25.4 | 68.07,25.4 68.83,24.64 68.83,20.57 R12.P$1 | R10.P$1 68.83,33.53 68.83,26.16 68.07,25.4
N$12
  Bottom 0.406: COOL.K 64.77,4.83 66.55,6.6 R11.P$2
N$13
  Top 0.406: Q5.1 16.07,63.82 16.76,64.52 18.41,64.52 U4.2
N$14
  Top 0.406: U4.4 11.39,61.85 | 11.39,61.85 R15.2 | R16.1 8.55,63.84 9.14,63.5 9.99,63.25 11.39,61.85
N$15
  Top 0.406: U4.6 16.64,59.31 16,59.94 16,60.03 C14.2
N$16  (via drill 0.25)
  Top 0.254: v26.16,61.98 26.42,63.08 R17.1
  Top 0.406: U4.15 25.27,64.39 25.65,64.01 25.65,63.25 R17.1
  Bottom 0.254: SJ1.2 v26.16,61.98
N$17
  Top 0.406: U4.7 16.13,58.04 15.75,58.42 14.57,58.42 C12.1 11.43,58.51 R13.2
N$18
  Top 0.406: U4.8 14.52,56.77 C12.2 11.18,56.81 R14.2
N$19
  Top 0.406: U5.2 17.4,49.15 16.76,48.51 15.92,48.51 Q6.1
N$20
  Top 0.406: R21.1 8.89,49.44 8.89,48.51 9.4,48.01 10.16,48.01 10.25,47.92 R20.2 16.26,46.74 16.89,46.61 U5.4
N$21
  Top 0.406: C20.2 16.26,45.21 17.27,44.2 18.41,44.2 U5.6
N$22  (via drill 0.25)
  Top 0.254: v26.92,45.97 26.92,47.41 R22.1
  Top 0.305: R22.1 26.84,48.09 25.65,49.28 24.26,49.28 U5.15
  Bottom 0.254: SJ3.2 27.18,46.48 v26.92,45.97
N$23
  Top 0.406: U5.7 16.38,42.8 16,43.18 15.41,43.18 C18.1 15.07,43.18 12.19,43.18 11.18,44.2 R18.2
N$24
  Top 0.406: U5.8 15.46,41.53 C18.2 12.03,41.31 11.43,41.91 R19.2
N$25
  Top 0.406: Q7.1 15.56,32.58 16.26,33.27 18.66,33.27 U7.2
N$26
  Top 0.406: U7.4 18.16,30.61 17.78,30.99 10.5,30.99 | 10.5,30.99 R25.2 | 10.5,30.99 10.5,31.92 10.16,32.26 8.89,32.26 8.64,32.51 8.64,33.69 R26.1
N$27
  Top 0.406: C26.2 16.09,28.61 16.76,27.94 18.66,27.94 U7.6
N$28  (via drill 0.25)
  Top 0.254: v26.16,31.24 27.09,31.5 R27.1
  Top 0.406: R27.1 27.18,31.75 25.91,33.02 24.52,33.02 U7.15
  Bottom 0.254: SJ4.2 v26.16,31.24
N$29
  Top 0.406: U7.7 16.89,26.8 16.51,27.18 15.33,27.18 C24.1 12.1,27.27 11.18,28.19 R23.2
N$30
  Top 0.406: U7.8 15.28,25.53 C24.2 10.34,25.57 R24.2
N$31
  Top 0.406: Q8.1 16.32,17.85 16.51,18.03 18.66,18.03 U8.2
N$32
  Top 0.406: R31.1 8.55,17.11 8.64,17.02 9.91,17.02 10.16,16.76 10.16,15.58 R30.2 10.92,15.49 11.43,16 17.27,16 17.78,15.49 18.66,15.49 U8.4
N$33
  Top 0.406: U8.6 17.14,13.08 16,13.72 16,13.97 C32.2
N$34  (via drill 0.25)
  Top 0.406: v27.43,15.24 27.34,16.34 R32.1 26.92,16.76 25.65,18.03 24.52,18.03 U8.15
  Bottom 0.406: v27.43,15.24 SJ5.2
N$35
  Top 0.406: U8.7 14.44,11.81 C30.1 14.06,12.19 12.95,12.19 12.19,12.95 R28.2
N$36
  Top 0.406: R29.2 14.14,10.41 C30.2 14.44,10.54 U8.8
N$37
  Top 1.676: JP3.1 85.6,29.97 87.38,31.75 92.33,31.75 U6.NO
N$38
  Top 1.676: JP3.2 79.25,5.59 74.68,10.16 U6.MAIN
N$39
  Top 1.676: JP5.1 53.85,29.46 56.13,31.75 61.85,31.75 U3.NO
N$40
  Top 1.676: JP5.2 48.26,5.33 44.2,9.4 U3.MAIN
N$42
  Top 0.406: R33.2 ACTIVITY.C
N$44
  Top 0.406: R34.2 POWER.C
RESET  (via drill 0.25)
  Top 0.406: S1.3 S1.4 69.47,52.2 70.1,52.83 70.1,54.01 R6.1 74.17,54.1 75.18,55.12 v75.18,58.67 | C9.1 76.45,68.58 77.47,67.31 77.47,64.52 77.22,64.26 76.71,64.26 | 76.71,64.26 76.45,64.52 75.27,64.52 U2.29 | v77.47,62.74 76.96,64.01 76.71,64.26
  Bottom 0.406: v75.18,58.67 75.44,58.67 77.47,59.69 v77.47,62.74
RXI  (via drill 0.25)
  Top 0.406: U2.30 76.64,65.21 v76.71,65.28
  Bottom 0.406: v76.71,65.28 77.98,65.28 PRGRAMR.3
SCK  (via drill 0.25)
  Top 0.254: v21.08,12.95 24.26,12.95 U8.11 | v21.08,59.18 21.21,59.31 U4.11 | U5.11 21.46,44.07 v21.34,44.2 | U7.11 21.46,28.07 v21.34,28.19 | U1.11 34.16,54.74 v34.29,54.61 | U2.32 72.65,66.81 70.87,65.02 v68.33,65.02
  Bottom 0.254: 20.57,44.2 20.57,58.93 20.83,59.18 v21.08,59.18 21.34,59.44 27.69,59.44 32.51,54.61 v34.29,54.61 39.12,59.44 58.67,59.44 62.48,63.25 62.48,67.06 62.99,67.82 67.56,67.82 68.33,67.31 v68.33,65.02 | 20.57,44.2 20.57,27.94 | 20.57,27.94 20.57,13.46 v21.08,12.95 | v21.34,44.2 20.57,44.2 | v21.34,28.19 20.83,28.19 20.57,27.94
TXO  (via drill 0.25)
  Top 0.406: U2.31 76.17,66.01 v76.71,66.55
  Bottom 0.406: v76.71,66.55 76.71,67.56 78.23,69.09 PRGRAMR.2
VCC  (via drill 0.25)
  Top 0.406: 24.26,50.55 U5.16 U5.1 15.93,50.42 Q6.2 | 28.45,47.59 R22.2 | 28.45,47.41 R22.2 | 28.79,47.75 R22.2 | C16.1 25.32,53.77 | 28.19,63.16 R17.2 | 26.67,65.7 C13.1 26.45,65.66 U4.16 U4.1 18.48,65.72 Q5.2 | Q1.2 40.51,64.72 U1.1 U1.16 40.51,54.32 | 40.51,54.32 C5.1 | 40.51,54.32 43.06,54.32 C6.1 | C25.1 27.34,34.63 | 25.91,37.67 C22.1 | C25.1 27.22,34.42 U7.16 U7.1 18.73,34.48 Q7.2 | 29.04,32.93 28.96,33.02 | 27.43,34.46 C25.1 | 28.96,31.66 R27.2 | 26.16,22.43 C28.1 | 29.04,17.95 28.96,18.03 | 27.43,19.22 C31.1 | 26.16,19.56 26.04,19.43 U8.16 U8.1 18.41,19.81 15.49,19.81 15.43,19.75 Q8.2 | v68.07,56.64 68.58,57.15 68.83,57.66 68.83,59.68 U2.18 | U2.4 71.27,67.2 70.87,66.8 69.6,66.8 69.6,68.23 U2.6 69.67,66.36 v69.6,66.29 | C4.2 v68.07,56.64 | v68.07,56.64 67.98,56.3 R6.2 66.55,54.1 66.04,54.61 POWER.A | R36.2 R35.2 83.49,45.72 U13.3
  Top 0.813: 28.45,47.59 28.45,48.51 27.94,49.02 27.69,49.02 26.84,49.87 C19.1 24.26,50.55 24.26,52.53 C16.1 | C22.1 26.09,40.82 28.45,43.18 28.45,47.41 | 28.79,47.75 36.58,47.75 37.59,48.77 R5.2 37.68,50.04 38.35,50.04 38.86,50.55 38.86,53.09 39.71,53.94 C5.1 | 25.32,53.77 28.19,56.64 28.19,63.16 | R17.2 28.28,64.17 27.94,64.52 27.18,64.52 26.67,65.02 26.67,65.7 | C13.1 25.83,66.54 C10.1 25.83,72.06 v26.67,72.9 | 27.34,34.63 25.91,36.07 25.91,37.67 | R27.2 29.04,32.93 | 28.96,33.02 27.94,33.02 27.43,33.53 27.43,34.46 | C28.1 26.34,24.05 28.96,26.67 28.96,31.66 | C31.1 26.42,19.3 26.16,19.56 26.16,22.43 | 29.04,17.95 R32.2 35.56,16.76 39.12,13.21 39.12,10.41 | 28.96,18.03 27.69,18.03 27.43,18.29 27.43,19.22 | v81.03,45.47 82.02,46.23 U13.3 | +5VPOWER.1 39.12,10.41 | LED.1 25.65,8.38 27.69,10.41 39.12,10.41
  Bottom 0.406: 82.86,58.48 82.75,58.48 81.28,59.94 81.28,63.25 80.52,64.01 PRGRAMR.4 | 60.71,11.18 COOL.A 60.71,3.56 61.47,2.79 69.34,2.79 FANS.A 71.63,5.08 71.63,10.16 74.42,12.95 78.23,12.95 | 60.71,11.18 61.98,12.45 D2.C | U3.COIL1 53.2,16.4 58.42,11.18 60.71,11.18 | D1.C 78.23,12.95 | U6.COIL1 78.48,13.2 78.23,12.95 | MOTION.1 16.51,73.91 17.53,72.9 v26.67,72.9
  Bottom 0.813: v26.67,72.9 33.78,72.9 34.8,73.91 | 34.8,73.91 LEFT.1 | AMB.1 43.94,73.91 | 43.94,73.91 43.43,73.41 35.31,73.41 34.8,73.91 | TOP.1 52.83,73.66 | 52.83,73.66 52.32,73.15 44.7,73.15 43.94,73.91 | BOTTOM.1 61.72,73.41 | 61.72,73.41 61.21,72.9 53.59,72.9 52.83,73.66 | RIGHT.1 70.36,73.41 69.6,72.64 | 69.6,72.64 62.48,72.64 61.72,73.41 | 69.6,72.64 v69.6,66.29 69.6,57.15 | 69.6,57.15 v68.07,56.64 69.34,57.15 69.6,57.15 | X1.1-1 X1.2-1 X1.3-1 82.86,58.48 81.03,57.15 | 81.03,57.15 69.6,57.15 | 81.03,57.15 v81.03,45.47 | U3.COIL1 42.05,16.4 39.62,13.97 39.62,5.84 +5VPOWER.1

## Text on the board
tNames: GND | S | +5V | +5V | S | GND | +5V | S | GND | +5V | S | GND | +5V | S | GND | +5V | S | GND | GND | SCL | SDA | 3V3 | YLW | GRN | WHT | RED | DTR | RX | RED | TX | 5V | WHT | GND | GRN | YLW | GND | RED | SCL | SDA | WHT | GRN | YLW | RED | WHT | GRN | YLW | RED | WHT | GRN | YLW | GND | LED | GND | DAT | +5V | +5V